# Altium PCB STM32 refrence board.PcbDoc
Units mm, origin at the board's own origin, x right, y up, seen from the top; angles counter-clockwise.
Board outline 67.18 x 29.97 mm, 2 copper layers (Top Layer, Bottom Layer); 32 components, 58 nets, 215 pads, 51 vias.
Unrouted connection lines stored in the file: 2.
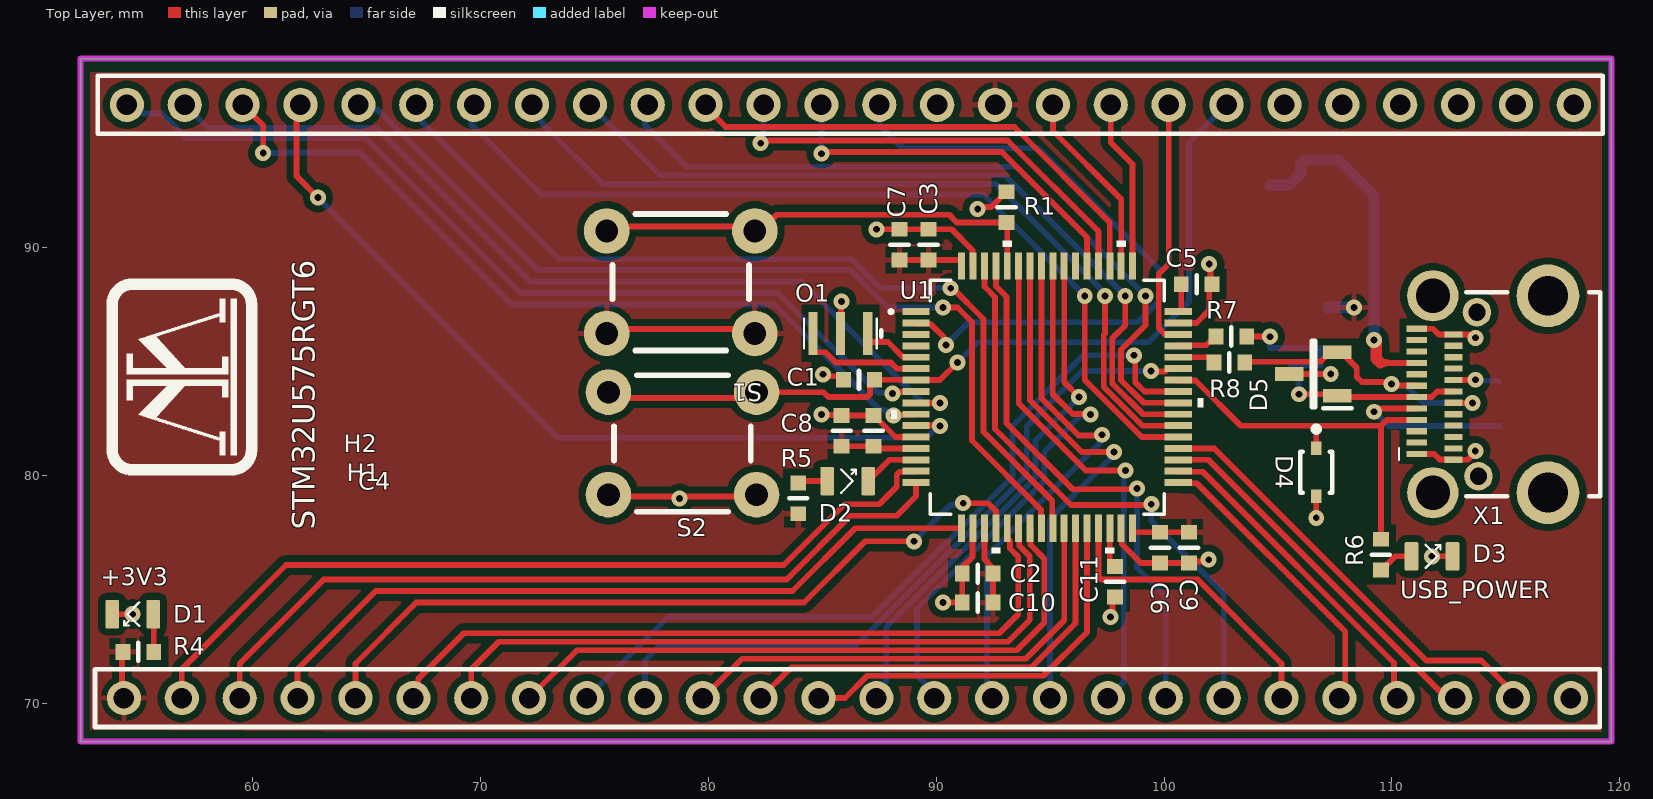
[diagram p0: Top Layer view]
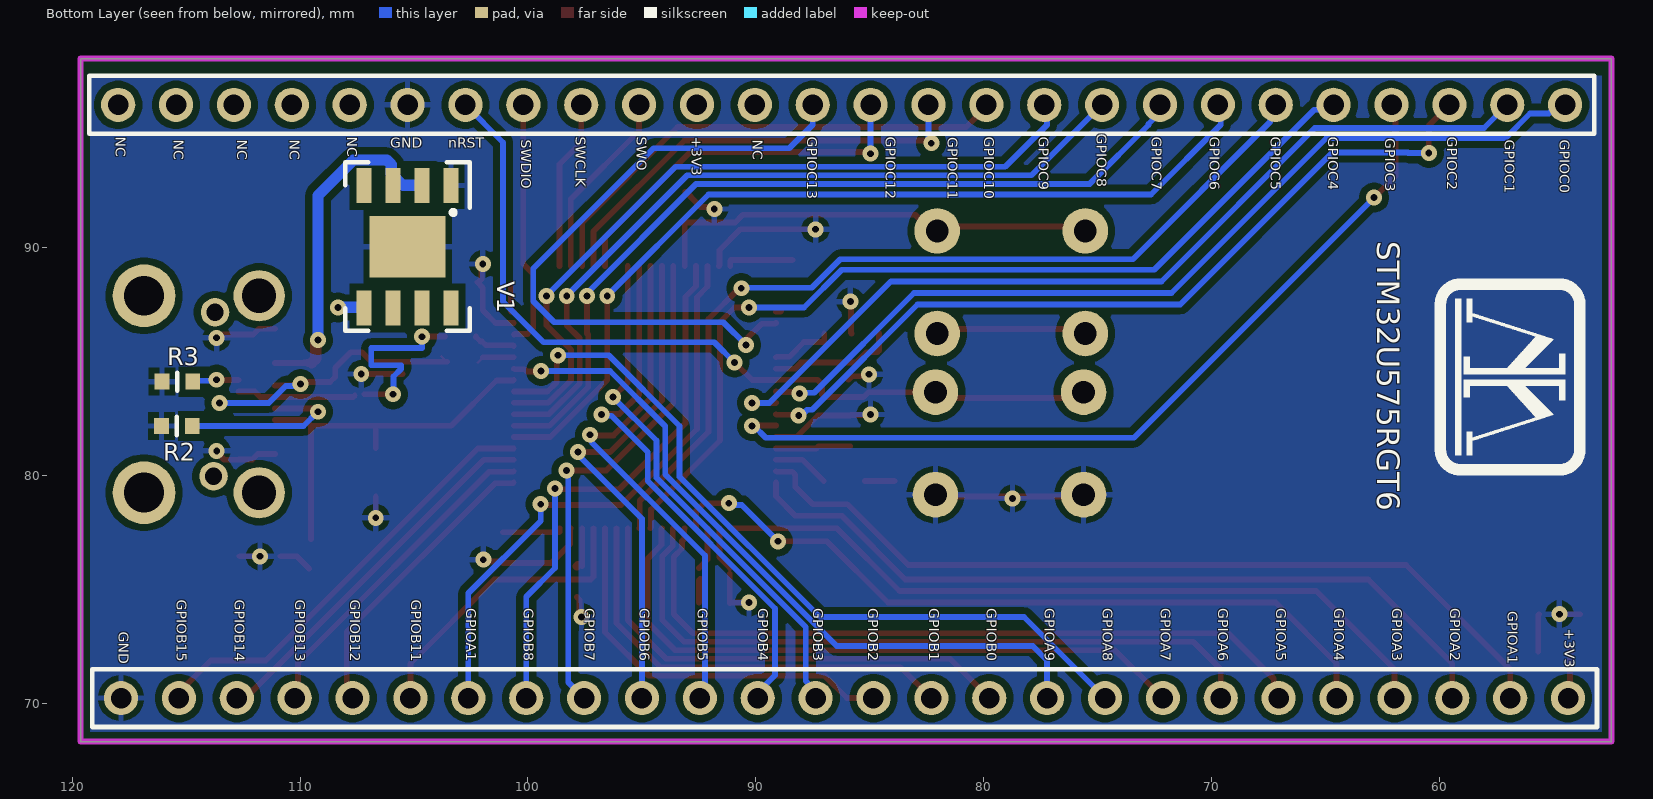
[diagram p1: Bottom Layer view, seen from below]

## Layer stack, top to bottom
Top Solder: solder mask 0.0102, Solder Resist, Dk 3.5
Top Layer: signal copper 0.0356
Dielectric 1: dielectric 0.32, FR-4, Dk 4.8
Bottom Layer: signal copper 0.0356
Bottom Solder: solder mask 0.0102, Solder Resist, Dk 3.5

## Board outline
52.451,68.326 119.634,68.326 119.634,98.298 52.451,98.298

## Design rules (kind name [scope] priority, off if disabled: settings)
BoardOutlineClearance [All] p1: gap=0.2 ignorepadtopadclearanceinfootprint=FALSE
Clearance "inPolygon Clearance" [InPolygon] p1: gap=0.3 ignorepadtopadclearanceinfootprint=TRUE // this rule ensures that every net within a polygon of a different net has a set clearance from the poly
Clearance "Different Diff Pair" [All] p2: gap=0.2 ignorepadtopadclearanceinfootprint=TRUE
Clearance "Same Diff Pair" [All] p3: gap=0.1 ignorepadtopadclearanceinfootprint=TRUE
Clearance "Different Nets" [not InAnyDifferentialPair] p4: gap=0.3 ignorepadtopadclearanceinfootprint=TRUE except(0.1: Arc-SMDPad Arc-THPad Arc-Via Arc-Text Track-SMDPad Track-THPad Track-Via Track-Text SMDPad-Text THPad-Text Via-Text Fill-Text Poly-Text Region-Text Text-Text; 0.12: Arc-Arc Arc-Track Track-Track; 0.15: SMDPad-SMDPad SMDPad-THPad SMDPad-Via THPad-THPad THPad-Via Via-Via; 0.2: Arc-Hole Track-Hole SMDPad-Hole THPad-Hole Via-Hole Fill-Hole Poly-Hole Region-Hole Text-Hole)
Clearance "Same Net" [not InAnyDifferentialPair] p5: gap=0 ignorepadtopadclearanceinfootprint=TRUE except(0.1: THPad-Via; 0.18: Arc-Arc Arc-Track Track-Track)
ComponentClearance [All] p1: gap=0.102 collisioncheckmode=3 verticalgap=0.102 showdistances=TRUE
DiffPairsRouting "Ethernet Routing" [InDifferentialPairClass('Ethernet_Pairs')] p1: maxlimit=0.2 minlimit=0.2 mostfreqgap=0.2 toplayer_minwidth=0.25 toplayer_maxwidth=0.25 toplayer_prefwidth=0.25 bottomlayer_minwidth=0.25 bottomlayer_maxwidth=0.25 bottomlayer_prefwidth=0.25 impedanceprofiledriven=TRUE maxuncoupledlength=12.7
DiffPairsRouting "USB Routing" [InDifferentialPairClass('USB_Pairs')] p2: maxlimit=0.127 minlimit=0.127 mostfreqgap=0.127 toplayer_minwidth=0.23 toplayer_maxwidth=0.23 toplayer_prefwidth=0.23 bottomlayer_minwidth=0.23 bottomlayer_maxwidth=0.23 bottomlayer_prefwidth=0.23 impedanceprofiledriven=TRUE impedanceprofileid={F14BA31F-77FA-453E-8734-53F45B48A614} maxuncoupledlength=12.7
DiffPairsRouting "CAN Routing" [InDifferentialPairClass('CAN_Pairs')] p3: maxlimit=0.5 minlimit=0.5 mostfreqgap=0.5 toplayer_minwidth=0.201 toplayer_maxwidth=0.201 toplayer_prefwidth=0.201 bottomlayer_minwidth=0.201 bottomlayer_maxwidth=0.201 bottomlayer_prefwidth=0.201 impedanceprofiledriven=TRUE maxuncoupledlength=12.7
Height [All] p1: minheight=0 maxheight=1816.048 prefheight=12.7
HoleSize [All] p1: absolutevalues=TRUE maxlimit=6.3 minlimit=0.3 maxpercent=80.000 minpercent=20.000
HoleToHoleClearance [All] p1: gap=0.25 allowstackedmicrovias=FALSE
Length [All] p1: maxlimit=43.432 minlimit=0 usedelayunits=TRUE mindelay=0.000000 maxdelay=10000.000000
MatchedLengths "Diff Pair Matched Delays" [InDifferentialPairClass('Ethernet_Pairs') or InDifferentialPairClass('USB_Pairs') or InDifferentialPairClass('CAN_Pairs')] p1: tolerance=5 checknetsindiffpair=TRUE checkdiffpairvsdiffpair=FALSE checkxsignals=FALSE checkothers=FALSE usedelayunits=TRUE delaytolerance=100.000000
MinimumAnnularRing [All] p1: minimumring=0.2
MinimumSolderMaskSliver [All] p1: minsoldermaskwidth=0
PlaneClearance "Supply Net Clearance" [InNetClass('Supply_Nets')] p1: clearance=0.5
PlaneClearance "All Nets" [All] p2: clearance=0.3
PolygonConnect "Supply Nets" [InNetClass('Supply_Nets')] p1: connectstyle=Relief reliefconductorwidth=0.3 reliefentries=4 polygonreliefangle="90 Angle" conductorbypadedge=TRUE mindistance=0.381 enablemindistance=FALSE airgapwidth=0.254
PolygonConnect General [All] p2: connectstyle=Relief reliefconductorwidth=0.254 reliefentries=4 polygonreliefangle="90 Angle" airgapwidth=0.254
RoutingVias [All] p1: holewidth=0.2 width=0.35 viastyle="Through Hole" minholewidth=0.15 minwidth=0.3 maxholewidth=6.3 maxwidth=6.55
SilkToSilkClearance [All] p1: silktosilkclearance=0
SilkToSolderMaskClearance [All] p1: minsilkscreentomaskgap=0 clearancetoexposedcopper=TRUE
SolderMaskExpansion [All] p1: expansion=0.075 istentingtop=FALSE
SupplyNets "Schematic Supply Nets_3" [InNet('GND')] p1: voltage=0.000
SupplyNets "Schematic Supply Nets_7" [InNet('+3V3')] p2: voltage=0.000
UnRoutedNet [All] p1: checkbadconnections=TRUE
Width "nRF Width" [InNetClass('nRF Signal')] p1: maxlimit=0.379 minlimit=0.379 preferedwidth=0.379 impedanceprofiledriven=TRUE minimp=50.000000 maximp=50.000000 favimp=50.000000 checkconnectedcopper=TRUE
Width [All] p2: maxlimit=100 minlimit=0.1 preferedwidth=0.3
20 further rules are at their usual default settings.

## Classes and differential pairs
component class usb: D4 D5 H1 H2 R2 R3 R7 R8 V1 X1
component class MCU: C1 C2 C3 C4 C5 C6 C7 C8 C9 C10 C11 D1 D2 D3 O1 R1 R4 R5 R6 S1 S2 U1

## Components (designator, comment, footprint, x,y, rotation, side; value= is the part's Value field where it differs from the comment)
C1 "[Cap] 0603 0.1uF 10% 16V" "[Cap] SMD 0603" 86.614,84.201 r0 top
C2 "[Cap] 0603 10uF 20% 16V" "[Cap] SMD 0603" 91.821,75.692 r0 top
C3 "[Cap] 0603 10uF 20% 16V" "[Cap] SMD 0603" 89.662,90.13 r270 top
C4 "[Cap] 0603 10uF 20% 16V" "[Cap] SMD 0603" 87.249,81.955 r270 top
C5 "[Cap] 0603 0.1uF 10% 16V" "[Cap] SMD 0603" 101.433,88.392 r180 top
C6 "[Cap] 0603 0.1uF 10% 16V" "[Cap] SMD 0603" 99.822,76.835 r90 top
C7 "[Cap] 0603 0.1uF 10% 16V" "[Cap] SMD 0603" 88.392,90.13 r270 top
C8 "[Cap] 0603 0.1uF 10% 16V" "[Cap] SMD 0603" 85.852,81.955 r270 top
C9 "[Cap] 0603 0.1uF 10% 16V" "[Cap] SMD 0603" 101.092,76.835 r90 top
C10 "[Cap] 0603 0.1uF 10% 16V" "[Cap] SMD 0603" 91.821,74.422 r0 top
C11 "[Cap] 0603 4.7uF 10% 25V" "[Cap] SMD 0603" 97.851,75.337 r90 top
D1 "[LED] SMD 0805 Green" "[LED] SMD 0805" 54.737,73.914 r180 top
D2 "[LED] SMD 0805 Green" "[LED] SMD 0805" 86.117,79.756 r0 top
D3 "[LED] SMD 0805 Red" "[LED] SMD 0805" 111.76,76.454 r0 top
D4 "DESD5V0S1BA-7" FP-SOD323-MFG 106.68,80.137 r270 top value=35pF
D5 "TPD2E2U06QDBZRQ1" SOT95P237X95-3N 106.553,84.455 r180 top
H1 "1x26 Header" "[Header] 1x26 Male" 86.106,70.231 r0 top
H2 "1x26 Header" "[Header] 1x26 Male" 86.233,96.266 r180 top
O1 "XOSC 12MHz" "[Resonator] SMD 12MHz" 85.795,86.233 r180 top
R1 "[10k] SMD 0603 1% 1/8W" "[Res] SMD 0603" 93.091,91.781 r270 top
R2 "[5.1k] SMD 0603 1% 1/10W" "[Res] SMD 0603" 115.403,82.169 r180 bottom
R3 "[5.1k] SMD 0603 1% 1/10W" "[Res] SMD 0603" 115.381,84.115 r0 bottom
R4 "[220] SMD 0603 1% 1/10W" "[Res] SMD 0603" 54.991,72.263 r180 top
R5 "[220] SMD 0603 1% 1/10W" "[Res] SMD 0603" 83.947,78.994 r270 top
R6 "[1k] SMD 0603 1% 1/10W" "[Res] SMD 0603" 109.513,76.531 r90 top
R7 "[27] SMD 0603 1% 1/10W" "[Res] SMD 0603" 102.957,86.106 r0 top
R8 "[27] SMD 0603 1% 1/10W" "[Res] SMD 0603" 102.87,84.963 r0 top
S1 "Standard pushbutton" "[SPST] Pushbutton" 78.792,88.483 r180 top
S2 "Standard pushbutton" "[SPST] Pushbutton" 78.867,81.407 r180 top
U1 "STM32U575RGT6" LQFP64-10x10mm_STM 94.869,83.439 r0 top
V1 "3V3 1.5A" "[Linear] 3V3 1.5A" 105.283,90.043 r270 bottom
X1 "USB-C" "[USB] USB-C Right-Angle" 115.062,83.566 r90 top

## Footprints (in the part's own frame and the unit in brackets; to place one, negate y for a bottom-side part, rotate by r counter-clockwise, add the part's x,y. Pads: shape width x height; smd on the part's side, far side on the other; paste and mask are expansions set on the pad)
"[Cap] SMD 0603" [mm]
  rect 0.65x0.7 smd: 1(-0.675,0) 2(0.675,0)
  silkscreen extent 0,-0.4 0,0.4, body extent -0.8,-0.45 0.8,0.45, height 0.8
"[Header] 1x26 Male" [mm]
  round 1.5 hole 0.9: 1(-31.75,0) 2(-29.21,0) 3(-26.67,0) 4(-24.13,0.001) 5(-21.59,0) 6(-19.05,0) 7(-16.51,0) 8(-13.97,0) 9(-11.43,0) 10(-8.89,0) 11(-6.35,0) 12(-3.81,0) 13(-1.27,0) 14(1.27,0) 15(3.81,0) 16(6.35,0) 17(8.89,0) 18(11.43,0) 19(13.97,0) 20(16.51,0) 21(19.05,0) 22(21.59,0) 23(24.13,0) 24(26.67,0) 25(29.21,0) 26(31.75,0)
  silkscreen extent -33.02,-1.27 33.02,1.27, body extent -33.02,-1.27 33.02,1.27, height 9.5
"[LED] SMD 0805" [mm]
  rrect20% 0.6x1.25 smd: 1(-0.9,0) 2(0.9,0)
  silkscreen extent -0.28,-0.51 0.37,0.51, body extent -1,-0.65 1,0.65, height 0.8
"[Linear] 3V3 1.5A" [mm]
  rect 1.525x0.65 smd: 1(-2.688,1.905) 2(-2.688,0.635) 3(-2.688,-0.635) 4(-2.688,-1.905) 5(2.688,-1.905) 6(2.688,-0.635) 7(2.688,0.635) 8(2.688,1.905)
  rect 2.71x3.35 smd: 9(0,0)
  silkscreen extent -3.7,-2.73 3.7,2.73, body extent -3,-2.45 3,2.45, height 1.5
"[Res] SMD 0603" [mm]
  rect 0.65x0.7 smd: 1(-0.675,0) 2(0.675,0)
  silkscreen extent 0,-0.4 0,0.4, body extent -0.8,-0.45 0.8,0.45, height 0.8
"[Resonator] SMD 12MHz" [mm]
  rect 0.4x1.9 smd: 1(-1.2,0) 2(0,0) 3(1.2,0)
  silkscreen extent -1.8,-0.65 1.6,0.65, body extent -1.6,-0.65 1.6,0.65, height 0.8
"[SPST] Pushbutton" [mm] "(Regular pushbutton)"
  round 2 hole 1: 1(-3.25,2.25) 1(3.25,2.25) 2(-3.25,-2.25) 2(3.25,-2.25)
  silkscreen extent -3,-3 3,3, body extent -3.85,-3 3.85,3, height 4.95
"[USB] USB-C Right-Angle" [mm]
  rect 0.27x0.9 smd: A1(-2.625,3.965) A2(-2.125,3.965) A3(-1.625,3.965) A4(-1.125,3.965) A5(-0.625,3.965) A6(-0.125,3.965) A7(0.375,3.965) A8(0.875,3.965) A9(1.375,3.965) A10(1.875,3.965) A11(2.375,3.965) A12(2.875,3.965)
  rect 0.27x0.8 smd: B1(2.625,2.365) B2(2.125,2.365) B3(1.625,2.365) B4(1.125,2.365) B5(0.625,2.365) B6(0.125,2.365) B7(-0.375,2.365) B8(-0.875,2.365) B9(-1.375,2.365) B10(-1.875,2.365) B11(-2.375,2.365) B12(-2.875,2.365)
  round 2.75 hole 1.75: MH(-4.32,-1.785) MH(4.32,-1.785)
  round 2.25 hole 1.5: MH(-4.32,3.265) MH(4.32,3.265)
  round 1.25 hole 0.75: MH(-3.6,1.265) MH(3.6,1.33)
  silkscreen extent -4.47,-4.09 4.47,4.75, body extent -4.51,-4.16 4.43,4.01, height 2.92
FP-SOD323-MFG [mm]
  rect 0.59x0.45 smd paste+0 mask+0: 1(-1.055,0) 2(1.055,0)
  silkscreen extent -2.02,-0.7 0.9,0.7, body extent -1.45,-0.8 1.45,0.8, height 0.25
LQFP64-10x10mm_STM [mm]
  rect 1.194x0.305 smd paste+0 mask+0: 1(-5.75,3.75) 2(-5.75,3.25) 3(-5.75,2.75) 4(-5.75,2.25) 5(-5.75,1.75) 6(-5.75,1.25) 7(-5.75,0.75) 8(-5.75,0.25) 9(-5.75,-0.25) 10(-5.75,-0.75) 11(-5.75,-1.25) 12(-5.75,-1.75) 13(-5.75,-2.25) 14(-5.75,-2.75) 15(-5.75,-3.25) 16(-5.75,-3.75) 33(5.75,-3.75) 34(5.75,-3.25) 35(5.75,-2.75) 36(5.75,-2.25) 37(5.75,-1.75) 38(5.75,-1.25) 39(5.75,-0.75) 40(5.75,-0.25) 41(5.75,0.25) 42(5.75,0.75) 43(5.75,1.25) 44(5.75,1.75) 45(5.75,2.25) 46(5.75,2.75) 47(5.75,3.25) 48(5.75,3.75)
  rect 0.305x1.194 smd paste+0 mask+0: 17(-3.75,-5.75) 18(-3.25,-5.75) 19(-2.75,-5.75) 20(-2.25,-5.75) 21(-1.75,-5.75) 22(-1.25,-5.75) 23(-0.75,-5.75) 24(-0.25,-5.75) 25(0.25,-5.75) 26(0.75,-5.75) 27(1.25,-5.75) 28(1.75,-5.75) 29(2.25,-5.75) 30(2.75,-5.75) 31(3.25,-5.75) 32(3.75,-5.75) 49(3.75,5.75) 50(3.25,5.75) 51(2.75,5.75) 52(2.25,5.75) 53(1.75,5.75) 54(1.25,5.75) 55(0.75,5.75) 56(0.25,5.75) 57(-0.25,5.75) 58(-0.75,5.75) 59(-1.25,5.75) 60(-1.75,5.75) 61(-2.25,5.75) 62(-2.75,5.75) 63(-3.25,5.75) 64(-3.75,5.75)
  silkscreen extent -6.93,-6.85 6.85,6.85, body extent -6,-6 6,6, height 1.6
SOT95P237X95-3N [mm]
  rect 1.25x0.6 smd: 1(-1.05,0.95) 2(-1.05,-0.95) 3(1.05,0)
  silkscreen extent -1.68,-1.46 0.08,1.5, body extent -1.27,-1.46 1.27,1.46, height 1

## Part data
C1 C5 C6 C7 C8 C9 C10: "CC0603KRX7R7BB104", Capacitance=100nF, Max Voltage=16V, Size Package=0603, Supplier Part Number 1=311-1088-6-ND, Tolerance=10%, Supplier 1=DigiKey
C2 C3: "GRM188C81C106MA73D", Capacitance=10uF, Max Voltage=16V, Size Package=0603, Supplier Part Number 1=490-7198-1-ND, Tolerance=20%, Supplier 1=DigiKey
C4: "GRM188C81C106MA73D", Capacitance=1uF, Max Voltage=16V, Size Package=0603, Supplier Part Number 1=490-7198-1-ND, Tolerance=20%, Supplier 1=DigiKey
C11: "GRM188R61E475KE11D", Capacitance=4.7uF, Max Voltage=25V, Size Package=0603, Supplier Part Number 1=490-7203-6-ND, Tolerance=10%, Supplier 1=DigiKey
D1 D2: "LG R971-KN-1-0-20-R18", Color=Green, Size Package=0805, Supplier Part Number 1=475-LGR971-KN-1CT-ND, Supplier 1=DigiKey
D3: "LS R976-NR-1-0-20-R18", Color=Red, Size Package=0805, Supplier Part Number 1=475-LSR976-NR-1CT-ND, Supplier 1=DigiKey
D4: library part CMP-12828-000011-1, "TVS DIODE 5V 14V SOD323", Breakdown Voltage=5.5V, Capacitance=35pF, Clamping Voltage=14V, Manufacturer="Diodes Inc", Max Junction Temp=+150°C, Package=SOD323, Peak Pulse Current=12A, Peak Pulse Power=130W, Reverse Standoff Voltage=5V, Temperature="-65°C to +150°C", Temperature Range Low=-65°C, Automotive=No, Category=Diode, ComponentLink2Description=Datasheet, ComponentLink2URL=https://www.diodes.com/assets/Datasheets/ds31275.pdf, Device Class L1="Circuit Protection", Device Class L2="TVS Diodes", Device Class L3=unset, Digikey Description="TVS DIODE 5V 14V SOD323", Direction=Bidirectional, Height=1.2mm, Lead Free=Yes, Manufacturer Part Number=DESD5V0S1BA-7, Mouser Description="TVS Diodes / ESD Suppressors Low Cap BI TVS Diode 130W 12A 200mW", Number of Channels=1, Octopart=https://octopart.com/desd5v0s1ba-7-diodes+inc.-23272867, RoHS=TRUE, Standoff Height=0.05mm, Temperature Range High=+150°C
D5: library part CMP-018-000010-3, "USB ESD Protection", Manufacturer_Name="Texas Instruments", Mouser Part Number=595-TPD2E2U06QDBZRQ1, Arrow Part Number=TPD2E2U06QDBZRQ1, Arrow Price/Stock=https://www.arrow.com/en/products/tpd2e2u06qdbzrq1/texas-instruments?region=nac, Datasheet Link=http://www.ti.com/lit/gpn/tpd2e2u06-q1, Design Item ID=TPD2E2U06QDBZRQ1, Height=0.95mm, Manufacturer_Part_Number=TPD2E2U06QDBZRQ1, Mouser Price/Stock=https://www.mouser.co.uk/ProductDetail/Texas-Instruments/TPD2E2U06QDBZRQ1?qs=ADSrZYdIRCdCCkTjX0u0BA%3D%3D, Source=SamacSys.SchLib
H1 H2: library part "[Header] 1x26 Male", "2.54mm pitch"
O1: library part "[Resonator] SMD 12MHz", "CSTNE12M0GH5L000R0", Supplier Part Number 1=490-17947-1-ND, Supplier 1=DigiKey
R1: "RMCF0603FT10K0", Resistance=10k, Size Package=0603, Supplier Part Number 1=RMCF0603FT10K0DKR-ND, Tolerance=1%, Supplier 1=DigiKey, Wattage=1/10W
R2 R3: "RC0603FR-075K1L", Resistance=5.1k, Size Package=0603, Supplier Part Number 1=311-5.10KHRCT-ND, Tolerance=1%, Supplier 1=DigiKey, Wattage=1/10W
R4 R5: "CRGCQ0805F220R", Resistance=220, Size Package=0603, Supplier Part Number 1=A129741CT-ND, Tolerance=1%, Supplier 1=DigiKey, Wattage=1/8W
R6: "RMCF0603FT1K00", Resistance=1k, Size Package=0603, Supplier Part Number 1=RMCF0603FT1K00DKR-ND, Tolerance=1%, Supplier 1=DigiKey, Wattage=1/10W
R7 R8: "MCT06030C2709FP500", Resistance=27, Size Package=0603, Supplier Part Number 1=749-1631-1-ND, Tolerance=1%, Supplier 1=DigiKey, Wattage=1/10W
S1 S2: library part "[SPST] Pushbutton", Supplier Part Number 1=450-1650-ND, Supplier 1=DigiKey
U1: library part CMP-031-00064-2, "Ultra-low-power with FPU Arm Cortex-M33 MCU with TrustZone, 160 MHz with 1 Mbyte of Flash memory", Manufacturer_Name=STMicroelectronics, Component Type=Standard, Copyright="Copyright (C) 2025 Ultra Librarian. All rights reserved.", Datasheet=https://www.st.com/resource/en/datasheet/stm32u575ag.pdf, Design Item ID=STM32U575RGT6, Manufacturer_Part_Number=STM32U575RGT6, Pins=64, RefDes=RefDes, Source=STM32U575RGT6.SchLib, Type=Type
V1: library part "[Linear] 3V3 1.5A", "AP7362A-33SP-13", Supplier Part Number 1=AP7362A-33SP-13DICT-ND, Supplier 1=DigiKey
X1: library part "[USB] Type-C Right-Angle", Supplier Part Number 1=670-3104-1-ND, Supplier 1=DigiKey

## Via types
v1: diameter 0.7, hole 0.3, Top Layer to Bottom Layer, 51 vias

## Nets (pads, with @x,y where several pads share a name; then routed paths per layer and width w, separated by ;. In a path a pad name is that pad's centre, name@x,y a point inside that pad or via, vN(x,y) a via of type N, cw(c..) or ccw(c..) an arc to the next point about the centre after c; other vN are vias at no path point)
+3V3: C2.2 C3.2 C4.2 C5.2 C6.2 C7.2 C8.2 C9.2 C10.2 H1.1 H2.11 R4.2 R5.2 S1.1 U1.1 U1.13 U1.19 U1.32 U1.48 U1.64 V1.5 | length 23.4
  Top Layer w0.254: R4.2@54.189,72.263 R4.2@54.273,72.179 ; R4.2@54.273,72.433 R4.2@54.273,72.179 ; H1.1 54.273,70.315 R4.2@54.273,72.179 ; S1.1@75.542,86.432 S1.1@82.042,86.432 ; C8.2 C4.2 87.34,81.189 U1.13 ; C7.2 C3.2 91.094,89.455 91.119,89.43 U1.64 ; U1.1@88.9,87.214 88.925,87.189 U1.1 ; U1.19 92.119,76.323 C2.2@92.496,75.946 ; C2.2@92.442,75.452 92.496,75.398 C10.2 ; U1.32 98.619,77.535 98.644,77.51 C6.2 C9.2 ; U1.48 100.733,87.189 100.758,87.214 C5.2
  Bottom Layer w0.5: V1.5 107.209,87.376 v1(108.331,87.376)
BOOTSEL: R1.2 S1.2 U1.60 | length 19.7
  Top Layer w0.254: S1.2@75.542,90.932 82.496,90.932 83.004,91.44 90.572,91.44 90.906,91.106 R1.2 ; U1.60 R1.2@93.119,91
GND: C1.1 C2.1 C3.1 C4.1 C5.1 C6.1 C7.1 C8.1 C9.1 C10.1 C11.1 D1.2 D3.2 D4.2 D5.3 H1.26 H2.6 O1.2 R1.1 R2.1 R3.2 S2.1 U1.12 U1.18 U1.31 U1.47 U1.63 V1.1 V1.9 X1.A1 X1.A12 X1.B1 X1.B12 | length 44.4
  Top Layer w0.254: D1.2@53.826,73.914 v1(54.737,73.914) ; S2.1@75.617,79.157 75.698,79.076 78.658,79.076 v1(78.74,78.994) 78.822,79.076 81.817,79.076 S2.1@81.99,78.903 ; v1(84.963,82.677) 84.987,82.653 85.828,82.653 C8.1 C4.1 87.274,82.63 88.215,81.689 U1.12 ; v1(85.029,84.441) 85.115,84.355 85.785,84.355 C1.1 ; O1.2 85.824,86.262 85.824,87.602 v1(85.852,87.63) ; v1(87.376,90.805) C7.1 C3.1 ; C3.1@89.687,90.805 90.678,90.805 91.594,89.889 91.594,89.214 U1.63 ; v1(90.297,74.422) 91.121,74.422 91.146,74.397 C10.1 C2.1 ; C2.1@91.146,75.946 91.146,75.971 91.6,76.425 91.6,77.67 U1.18 ; v1(91.821,91.694) 91.906,91.779 92.414,91.779 92.868,92.233 92.868,92.258 93.066,92.456 R1.1 ; v1(97.651,73.786) 97.736,73.871 97.736,74.547 C11.1 ; U1.31 98.144,77.664 98.144,76.989 98.973,76.16 C6.1 C9.1 101.164,76.232 101.886,76.232 v1(101.958,76.304) ; U1.47 101.421,86.689 101.981,87.249 101.981,88.24 102.218,88.477 102.182,88.477 102.044,88.615 102.044,89.218 v1(101.981,89.281) ; D5.3 v1(107.315,84.455) ; v1(106.68,78.144) D4.2 ; X1.A1 111.854,80.941 112.096,80.699 X1.B12@112.697,80.699 ; X1.A12 111.801,86.441 112.051,86.191 X1.B1 112.705,86.183 113.401,86.183 113.54,86.043 v1(113.661,86.043) ; v1(111.76,76.454) D3.2 ; X1.B12 113.325,80.691 113.658,81.024 v1(113.658,81.082)
GPIOA1: H1.2 U1.15 | length 37.4
  Top Layer w0.254: H1.2 56.896,71.501 61.468,76.073 83.312,76.073 85.979,78.74 87.503,78.74 88.265,79.502 88.265,80.036 88.392,80.164 89.094,80.164 U1.15
GPIOA2: H1.3 U1.16 | length 34.8
  Top Layer w0.254: H1.3 59.436,71.755 63.119,75.438 83.439,75.438 86.233,78.232 88.265,78.232 89.119,79.086 U1.16
GPIOA3: H1.4 U1.17 | length 33
  Top Layer w0.254: H1.4 61.976,71.501 65.405,74.93 83.693,74.93 86.452,77.689 U1.17
GPIOA4: H1.5 U1.20 | length 33.4
  Top Layer w0.254: H1.5 64.516,71.755 67.183,74.422 84.201,74.422 86.891,77.112 v1(89.027,77.112) ; v1(91.186,78.786) 92.273,78.786 92.619,78.44 U1.20
  Bottom Layer w0.254: v1(89.027,77.112) 90.616,78.701 91.101,78.701 v1(91.186,78.786)
GPIOA5: H1.6 U1.21 | length 32.4
  Top Layer w0.254: H1.6 67.269,70.445 67.269,71.079 69.269,73.079 91.095,73.079 ; 91.096,73.078 92.763,73.078 93.599,73.914 93.599,76.436 93.24,76.796 93.24,77.124 93.144,77.219 93.144,77.664 U1.21
GPIOA6: H1.7 U1.22 | length 30.9
  Top Layer w0.254: H1.7 69.596,71.501 70.8,72.705 90.94,72.705 ; 90.941,72.704 93.151,72.704 94.107,73.66 94.107,76.457 93.644,76.92 93.644,77.664 U1.22
GPIOA7: H1.8 U1.23 | length 28.4
  Top Layer w0.254: H1.8 74.235,72.331 90.785,72.331 ; 90.786,72.33 93.539,72.33 94.742,73.533 94.742,76.351 94.136,76.957 94.136,77.672 U1.23
GPIOA8: H1.9 U1.41 | length 34.8
  Top Layer w0.254: v1(98.682,85.274) 98.737,85.219 98.737,84.089 99.137,83.689 U1.41
  Bottom Layer w0.254: H1.9 78.231,73.787 87.186,73.787 93.345,79.946 93.345,82.169 96.45,85.274 v1(98.682,85.274)
GPIOA10: H1.10 U1.43 | length 31.6
  Top Layer w0.254: v1(99.421,84.584) 99.437,84.568 100.054,84.568 100.149,84.664 100.594,84.664 U1.43
  Bottom Layer w0.254: H1.10 77.216,71.882 77.851,72.517 86.445,72.517 93.973,80.045 93.973,82.162 96.395,84.584 v1(99.421,84.584)
GPIOB0: H1.11 U1.26 | length 21.3
  Top Layer w0.254: H1.11 81.481,71.957 90.63,71.957 ; 90.631,71.956 93.927,71.956 95.619,73.648 U1.26
GPIOB1: H1.12 U1.27 | length 19.4
  Top Layer w0.254: H1.12 83.647,71.583 90.475,71.583 94.188,71.582 96.119,73.513 U1.27
GPIOB2: H1.13 U1.28 | length 17.5
  Top Layer w0.254: H1.13 85.994,70.231 86.971,71.209 90.321,71.209 ; 90.321,71.208 94.703,71.208 96.619,73.124 U1.28
GPIOB3: H1.14 U1.55 | length 22.9
  Top Layer w0.254: U1.55 95.619,84.092 96.266,83.445 v1(96.266,83.439)
  Bottom Layer w0.254: H1.14 87.376,70.546 87.811,70.982 87.811,73.354 94.361,79.904 94.361,81.535 v1(96.266,83.439)
GPIOB4: H1.15 U1.56 | length 23.8
  Top Layer w0.254: U1.56 95.119,83.57 95.99,82.699 96.752,82.699 v1(96.774,82.677)
  Bottom Layer w0.254: H1.15 89.916,70.473 89.154,71.236 89.154,74.168 94.742,79.756 94.742,81.026 96.336,82.62 96.717,82.62 v1(96.774,82.677)
GPIOB5: H1.16 U1.57 | length 22.9
  Top Layer w0.254: U1.57 94.619,83.39 96.248,81.761 97.255,81.761 v1(97.282,81.788)
  Bottom Layer w0.254: H1.16 92.232,70.455 92.232,76.484 97.197,81.449 97.197,81.703 v1(97.282,81.788)
GPIOB6: H1.17 U1.58 | length 22.5
  Top Layer w0.254: U1.58 94.119,83.3 96.393,81.026 97.799,81.026 v1(97.805,81.033)
  Bottom Layer w0.254: H1.17 94.996,78.099 97.62,80.723 97.62,80.727 97.805,80.912 v1(97.805,81.033)
GPIOB7: H1.18 U1.59 | length 22.2
  Top Layer w0.254: U1.59 93.619,83.165 96.561,80.223 v1(98.313,80.223)
  Bottom Layer w0.254: H1.18 98.228,70.923 98.228,80.137 v1(98.313,80.223)
GPIOB8: H1.19 U1.61 | length 23.8
  Top Layer w0.254: U1.61 92.619,88.319 93.091,87.847 93.091,82.296 95.993,79.394 98.775,79.394 v1(98.816,79.436)
  Bottom Layer w0.254: v1(98.816,79.436) 98.816,75.936 100.076,74.676 H1.19
GPIOB9: H1.20 U1.62 | length 25.4
  Top Layer w0.254: U1.62 92.119,88.29 92.583,87.826 92.583,82.042 95.915,78.71 99.411,78.71 v1(99.441,78.74)
  Bottom Layer w0.254: v1(99.441,78.74) 99.441,78.005 102.616,74.83 H1.20
GPIOB10: H1.21 U1.29 | length 13.3
  Top Layer w0.254: U1.29 97.119,75.561 97.246,75.434 101.477,75.434 105.156,71.755 H1.21
GPIOB12: H1.22 U1.33 | length 13.1
  Top Layer w0.254: U1.33 100.644,79.664 101.438,79.664 107.95,73.152 107.95,70.822 107.696,70.568 H1.22
GPIOB13: H1.23 U1.34 | length 14.6
  Top Layer w0.254: U1.34 100.644,80.164 101.7,80.164 110.09,71.774 110.09,70.377 H1.23
GPIOB14: H1.24 U1.35 | length 16.5
  Top Layer w0.254: U1.35 101.937,80.689 112.055,70.571 112.099,70.571 112.439,70.231 H1.24
GPIOB15: H1.25 U1.36 | length 19.4
  Top Layer w0.254: U1.36 102.199,81.189 111.506,71.882 113.919,71.882 115.316,70.485 H1.25
GPIOC0: H2.26 U1.8 | length 39.9
  Top Layer w0.254: v1(88.09,83.594) 88.16,83.664 89.094,83.664 U1.8
  Bottom Layer w0.254: H2.26 54.82,96.266 55.201,95.885 56.022,95.885 57.092,94.815 64.951,94.815 71.755,88.011 83.058,88.011 87.433,83.636 88.049,83.636 v1(88.09,83.594)
GPIOC1: H2.25 U1.9 | length 39.6
  Top Layer w0.254: U1.9 89.121,83.187 90.168,83.187 v1(90.17,83.185)
  Bottom Layer w0.254: H2.25 58.039,95.25 65.467,95.25 72.198,88.519 84.074,88.519 89.408,83.185 v1(90.17,83.185)
GPIOC2: H2.24 U1.10 | length 36
  Top Layer w0.254: H2.24 60.467,95.362 v1(60.467,94.148) ; v1(88.118,82.635) 88.146,82.664 89.094,82.664 U1.10
  Bottom Layer w0.254: v1(60.467,94.148) 61.367,94.148 61.394,94.176 64.701,94.176 71.374,87.503 82.91,87.503 87.525,82.888 87.745,82.888 87.997,82.635 v1(88.118,82.635)
GPIOC3: H2.23 U1.11 | length 37.5
  Top Layer w0.254: H2.23 61.934,96.098 61.934,93.128 62.861,92.202 v1(62.865,92.202) ; U1.11 89.589,82.193 90.146,82.193 v1(90.17,82.169)
  Bottom Layer w0.254: v1(62.865,92.202) 73.406,81.661 87.376,81.661 87.466,81.661 89.569,81.661 90.077,82.169 v1(90.17,82.169)
GPIOC4: H2.22 U1.24 | length 41.2
  Top Layer w0.254: v1(90.297,87.376) 90.932,87.376 91.567,86.741 91.567,81.534 94.594,78.507 94.594,77.714 U1.24
  Bottom Layer w0.254: H2.22 64.856,96.053 65.491,96.053 72.517,89.027 86.233,89.027 87.884,87.376 v1(90.297,87.376)
GPIOC5: H2.21 U1.25 | length 39.5
  Top Layer w0.254: v1(90.636,88.217) 90.726,88.217 92.075,86.868 92.075,81.915 95.094,78.896 95.094,77.714 U1.25
  Bottom Layer w0.254: H2.21 67.421,96.028 67.421,95.52 73.45,89.491 86.298,89.491 87.547,88.242 90.611,88.242 v1(90.636,88.217)
GPIOC6: H2.20 U1.37 | length 39.8
  Top Layer w0.254: v1(96.52,87.884) 96.52,84.19 99.021,81.689 U1.37
  Bottom Layer w0.254: H2.20 69.596,96.139 69.596,95.389 72.656,92.329 92.075,92.329 v1(96.52,87.884)
GPIOC7: H2.19 U1.38 | length 36.9
  Top Layer w0.254: v1(97.409,87.884) 97.409,86.228 97.357,86.175 97.357,83.883 99.053,82.186 U1.38@100.616,82.186
  Bottom Layer w0.254: H2.19 72.263,95.929 72.771,95.421 72.771,95.377 75.35,92.798 92.61,92.798 97.409,87.999 v1(97.409,87.884)
GPIOC8: H2.18 U1.39 | length 34.4
  Top Layer w0.254: v1(98.298,87.884) 98.298,86.588 97.731,86.021 97.731,84.038 99.083,82.685 100.615,82.685 U1.39
  Bottom Layer w0.254: H2.18 77.897,93.172 93.01,93.172 98.185,87.997 v1@98.284,87.997
GPIOC9: H2.17 U1.40 | length 33.1
  Top Layer w0.254: v1(99.187,87.884) 99.187,86.596 98.105,85.513 98.105,84.192 99.108,83.189 U1.40
  Bottom Layer w0.254: H2.17 77.216,96.139 77.216,95.389 79.059,93.546 93.525,93.546 v1(99.187,87.884)
GPIOC10: H2.16 U1.51 | length 21.5
  Top Layer w0.254: H2.16@80.026,96.028 80.764,95.289 84.558,95.289 ; 84.558,95.289 85.368,95.289 ; 85.368,95.289 93.433,95.289 97.619,91.103 U1.51
GPIOC11: H2.15 U1.52 | length 19.8
  Top Layer w0.254: v1(82.3,94.584) 82.385,94.669 82.619,94.669 82.65,94.7 93.133,94.7 97.119,90.714 U1.52
  Bottom Layer w0.254: v1(82.3,94.584) 82.3,94.705 82.423,94.828 H2.15
GPIOC12: H2.14 U1.53 | length 16.6
  Top Layer w0.254: v1(84.963,94.123) 85.037,94.198 92.873,94.198 96.619,90.452 U1.53
  Bottom Layer w0.254: v1(84.963,94.123) H2.14
GPIOC13: H2.13 U1.2 | length 29.2
  Top Layer w0.254: U1.2 89.144,86.664 89.739,86.664 90.351,86.052 90.351,85.798 v1(90.424,85.725)
  Bottom Layer w0.254: H2.13 87.503,95.389 88.531,94.361 94.488,94.361 99.764,89.085 99.764,87.645 98.847,86.728 91.427,86.728 v1(90.424,85.725)
MCU-STATUS: D2.2 U1.14 | length 2.5
  Top Layer w0.254: D2.2 87.95,80.689 U1.14
NetC11_2: C11.2 U1.30 | length 1.7
  Top Layer w0.254: C11.2@97.619,76.03 U1.30
  Top Layer w0.381: C11.2@97.807,76.056 C11.2
NetD1_1: D1.1 R4.1 | length 1.7
  Top Layer w0.254: D1.1@55.626,73.914 55.666,73.874 R4.1
NetD2_1: D2.1 R5.1 | length 1.3
  Top Layer w0.254: R5.1@83.911,79.756 D2.1
NetD3_1: D3.1 R6.1 | length 1.5
  Top Layer w0.254: R6.1@109.601,75.906 110.149,76.454 D3.1
NetR2_2: R2.2 X1.A5 | length 7.7
  Top Layer w0.254: v1(109.213,82.797) 109.333,82.797 109.478,82.941 X1.A5
  Bottom Layer w0.254: v1(109.213,82.797) 109.227,82.797 109.855,82.169 R2.2
NetR3_1: R3.1 X1.B5 | length 2
  Top Layer w0.254: X1.B5 112.702,84.196 113.66,84.196 v1(113.665,84.201)
  Bottom Layer w0.254: v1(113.665,84.201) 113.708,84.158 114.663,84.158 R3.1
RESET: C1.2 H2.7 S2.2 U1.7 | length 36.9
  Top Layer w0.254: S2.2@75.49,83.403 S2.2@81.99,83.403 ; S2.2@82.131,83.77 82.245,83.657 85.054,83.657 85.271,83.439 86.964,83.439 87.091,83.566 87.091,84.003 C1.2 U1.7@89.107,84.201 ; U1.7 90.158,84.189 v1(90.932,84.963)
  Bottom Layer w0.254: v1(90.932,84.963) 91.82,85.851 99.313,85.851 101.092,87.63 101.092,94.615 H2.7
SWCLK: H2.9 U1.49 | length 7.5
  Top Layer w0.254: H2.9 97.663,94.615 98.619,93.659 U1.49
SWDIO: H2.8 U1.46 | length 10.9
  Top Layer w0.254: H2.8 100.203,89.281 99.764,88.842 99.764,86.474 100.023,86.214 100.594,86.214 U1.46
SWO: H2.10 U1.50 | length 8.3
  Top Layer w0.254: H2.10 95.123,95.123 98.119,92.127 U1.50
USB_D+: D5.1 R7.1 R7.2 U1.45 X1.A6 X1.B6 | length 15.6
  Top Layer w0.254: U1.45 100.644,85.714 101.843,85.714 102.012,85.883 102.084,85.883 102.282,86.081 R7.1 ; R7.2 103.639,86.099 104.641,86.099 v1(104.648,86.092) ; v1(105.918,83.566) D5.1@107.187,83.566 ; D5.1 107.667,83.441 X1.A6 ; X1.A6@111.105,83.449 111.748,83.449 111.99,83.691 X1.B6
  Bottom Layer w0.254: v1(104.648,86.092) 104.648,85.725 104.648,85.598 106.88,85.598 106.88,84.836 105.559,84.836 105.559,84.687 105.897,84.349 105.897,83.947 105.897,83.587 v1(105.918,83.566)
USB_D-: D5.2 R8.1 R8.2 U1.44 X1.A7 X1.B7 | length 15.3
  Top Layer w0.127: R8.1@101.969,85.189 R8.1 ; R8.2 103.593,85.011 R8.2@103.799,85.217
  Top Layer w0.254: U1.44 R8.1@101.969,85.189 ; R8.2@103.545,84.988 106.861,84.988 107.278,85.405 107.777,85.405 108.458,84.724 108.458,84.328 108.683,84.103 109.897,84.103 v1(109.982,84.018) ; v1@109.982,83.947 109.985,83.944 111.094,83.944 X1.A7 ; X1.B7 112.7,83.188 113.535,83.188 v1(113.538,83.185)
  Bottom Layer w0.254: v1(109.982,84.018) 110.067,83.933 110.631,83.933 111.379,83.185 v1(113.538,83.185)
USB_VBUS: D4.1 R6.2 U1.42 X1.A4 | length 17.4
  Top Layer w0.254: U1.42 100.644,84.164 101.383,84.164 103.365,82.182 106.617,82.182 ; D4.1 106.68,82.12 106.617,82.182 ; R6.2@109.523,77.216 109.523,82.182 ; X1.A4 111.089,82.433 109.774,82.433 109.523,82.182 ; 106.617,82.182 109.523,82.182
VREG-IN: V1.2 V1.3 X1.A9 | length 15
  Top Layer w0.254: 109.496,84.941 X1.A9
  Top Layer w0.5: v1(109.214,85.942) 109.214,85.888 109.314,85.788 109.314,85.123 109.496,84.941
  Bottom Layer w0.5: V1.2 105.481,92.731 105.993,93.244 105.993,93.644 106.192,93.844 107.658,93.844 109.214,92.288 v1(109.214,85.942)
XTAL_IN: O1.1 U1.5 | length 2.7
  Top Layer w0.254: O1.1 86.995,85.926 87.068,85.853 87.883,85.853 88.522,85.214 89.094,85.214 U1.5
XTAL_OUT: O1.3 U1.6 | length 5.6
  Top Layer w0.254: O1.3 84.595,85.483 84.668,85.41 85.147,85.41 85.594,84.963 88.011,84.963 88.285,84.689 U1.6
pads on no net: H2.1 H2.2 H2.3 H2.4 H2.5 H2.12 U1.3 U1.4 U1.54 V1.4 V1.6 V1.7 V1.8 X1.A2 X1.A3 X1.A8 X1.A10 X1.A11 X1.B2 X1.B3 X1.B4 X1.B8 X1.B9 X1.B10 X1.B11 X1.MH

## Polygon pours and split planes (outlines as drawn)
+3V3 on Top Layer "NONET_L01_P-001" (solid, remove dead copper, pour order 0): 52.186,68.858 52.186,97.687 119.369,97.687 119.369,68.436 111.112,68.46
GND on Bottom Layer "NONET_L01_P-001" (solid, remove dead copper, pour order 1): 52.873,97.536 52.873,68.199 119.279,68.199 119.44,97.536

## Keep-outs
Keep-Out Layer:
  lines w0.254: 52.451,68.326 119.634,68.326 119.634,98.298 101.536,98.298 69.151,98.298 52.451,98.298 52.451,68.326

## Silkscreen, mask and mechanical layers (free items; w line width, h text height)
Top Overlay:
  drawing of 12 lines, arcs and shapes, not listed
  text "STM32U575RGT6" at 62.73,77.616 h1 r90
  text "+3V3" at 53.34,75.184 h0.76
  text "USB_POWER" at 110.364,74.613 h0.76
Bottom Overlay:
  drawing of 12 lines, arcs and shapes, not listed
  text "GPIOC8" at 75.187,94.996 h0.76 r90
  text "GPIOC2" at 59.817,94.869 h0.76 r90
  text "GPIOC4" at 65.027,94.869 h0.76 r90
  text "GPIOC5" at 67.567,94.869 h0.76 r90
  text "GPIOC6" at 70.234,94.869 h0.76 r90
  text "GPIOC7" at 72.774,94.869 h0.76 r90
  text "GPIOC9" at 77.727,94.869 h0.76 r90
  text "GPIOC10" at 80.14,94.869 h0.76 r90
  text "GPIOC12" at 84.458,94.869 h0.76 r90
  text "GPIOC13" at 87.886,94.869 h0.76 r90
  text "+3V3" at 92.967,94.869 h0.76 r90
  text "SWO" at 95.38,94.869 h0.76 r90
  text "SWCLK" at 98.047,94.869 h0.76 r90
  text "NC" at 108.077,94.869 h0.76 r90
  text "NC" at 118.237,94.869 h0.76 r90
  text "GPIOC11" at 81.734,94.853 h0.76 r90
  text "GPIOC3" at 62.54,94.795 h0.76 r90
  text "GPIOC0" at 54.867,94.742 h0.76 r90
  text "GPIOC1" at 57.28,94.742 h0.76 r90
  text "NC" at 90.297,94.742 h0.76 r90
  text "SWDIO" at 100.449,94.742 h0.76 r90
  text "NC" at 110.617,94.742 h0.76 r90
  text "NC" at 112.903,94.742 h0.76 r90
  text "NC" at 115.697,94.742 h0.76 r90
  text "nRST" at 103.505,94.231 h0.76
  text "GND" at 106.045,94.231 h0.76
  text "STM32U575RGT6" at 62.73,90.278 h1 r90
  text "GPIOB11" at 105.283,74.549 h0.76 r90
  text "GPIOB12" at 107.95,74.549 h0.76 r90
  text "GPIOB13" at 110.363,74.549 h0.76 r90
  text "GPIOB14" at 113.03,74.549 h0.76 r90
  text "GPIOB15" at 115.57,74.549 h0.76 r90
  text "GPIOA2" at 59.69,74.168 h0.76 r90
  text "GPIOA3" at 62.23,74.168 h0.76 r90
  text "GPIOA4" at 64.77,74.168 h0.76 r90
  text "GPIOA5" at 67.31,74.168 h0.76 r90
  text "GPIOA6" at 69.85,74.168 h0.76 r90
  text "GPIOA7" at 72.39,74.168 h0.76 r90
  text "GPIOA8" at 74.93,74.168 h0.76 r90
  text "GPIOA9" at 77.47,74.168 h0.76 r90
  text "GPIOB0" at 80.01,74.168 h0.76 r90
  text "GPIOB1" at 82.55,74.168 h0.76 r90
  text "GPIOB2" at 85.217,74.168 h0.76 r90
  text "GPIOB3" at 87.63,74.168 h0.76 r90
  text "GPIOB4" at 90.043,74.168 h0.76 r90
  text "GPIOB5" at 92.71,74.168 h0.76 r90
  text "GPIOB6" at 95.25,74.168 h0.76 r90
  text "GPIOB7" at 97.663,74.168 h0.76 r90
  text "GPIOB8" at 100.33,74.168 h0.76 r90
  text "GPIOA1" at 102.87,74.168 h0.76 r90
  text "GPIOA1" at 57.15,74.041 h0.76 r90
  text "+3V3" at 54.651,73.264 h0.76 r90
  text "GND" at 118.11,73.152 h0.76 r90

## Text inside footprints (layer, text, board x,y; h text height)
U1: Mechanical 13 "RefDes2" at 92.646,82.804 h0.76